# Altium PCB PCB1.PcbDoc
Units mil, origin at the board's own origin, x right, y up, seen from the top; angles counter-clockwise.
Board outline 2590 x 3365 mil, 4 copper layers (Top Layer 1, Layer 1, Layer 2, Bottom Layer 1), stack 23.712 mil thick; 19 components, 32 nets, 113 pads, 29 vias.
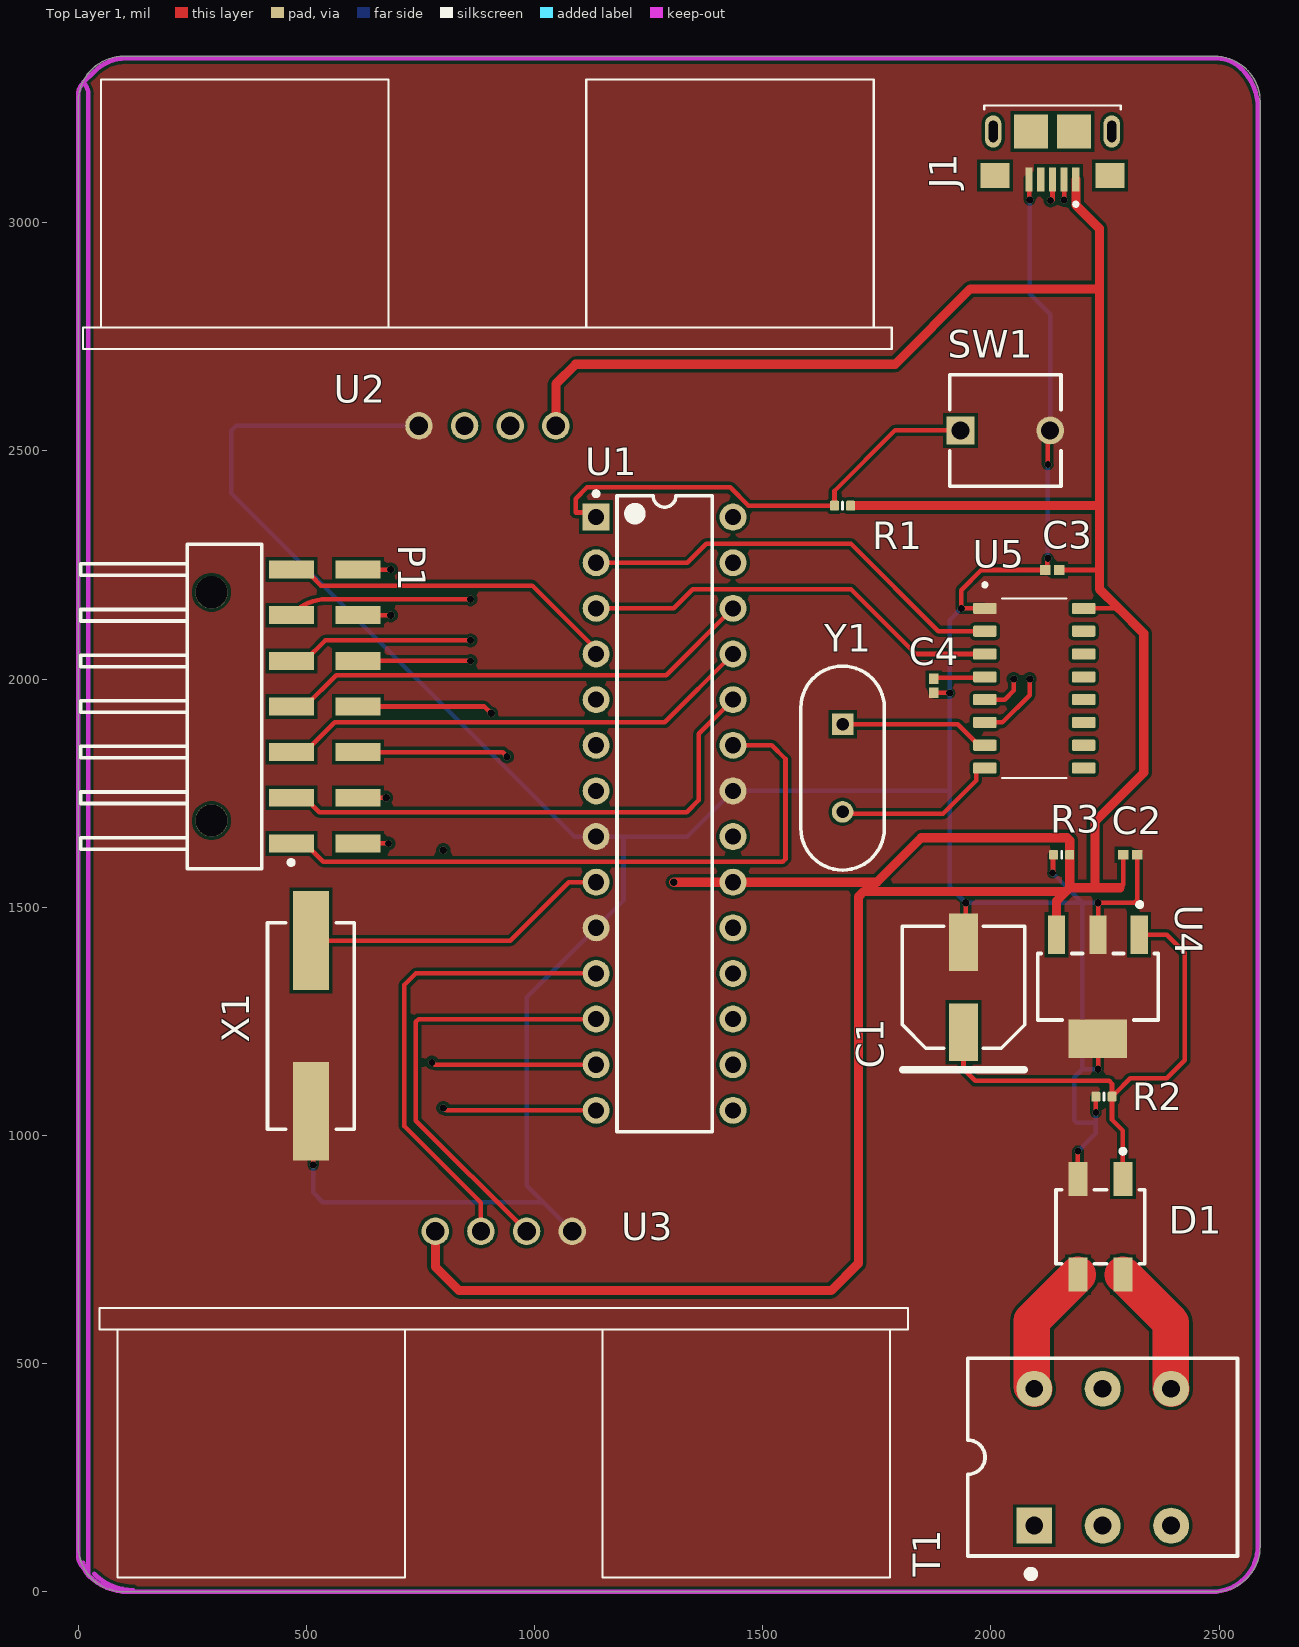
[diagram p0: Top Layer 1 view]
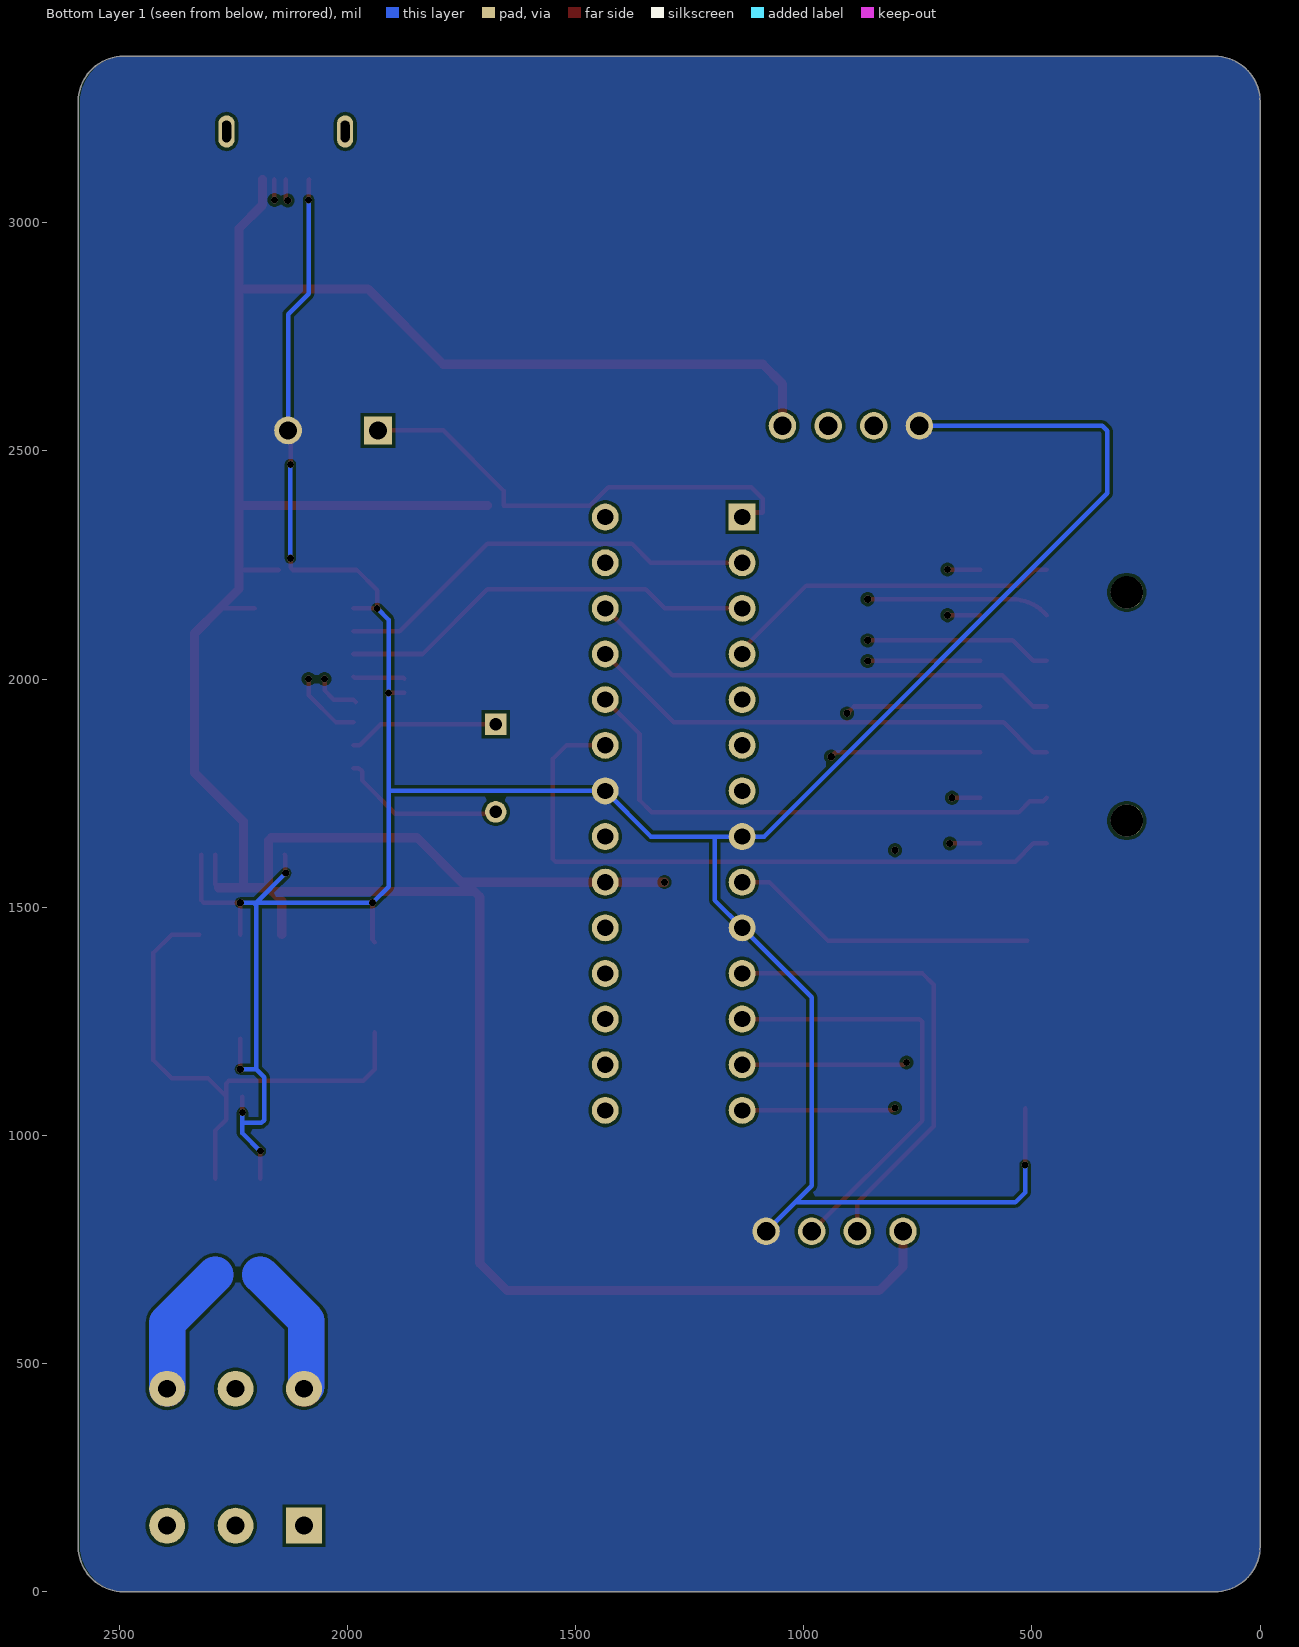
[diagram p1: Bottom Layer 1 view, seen from below]
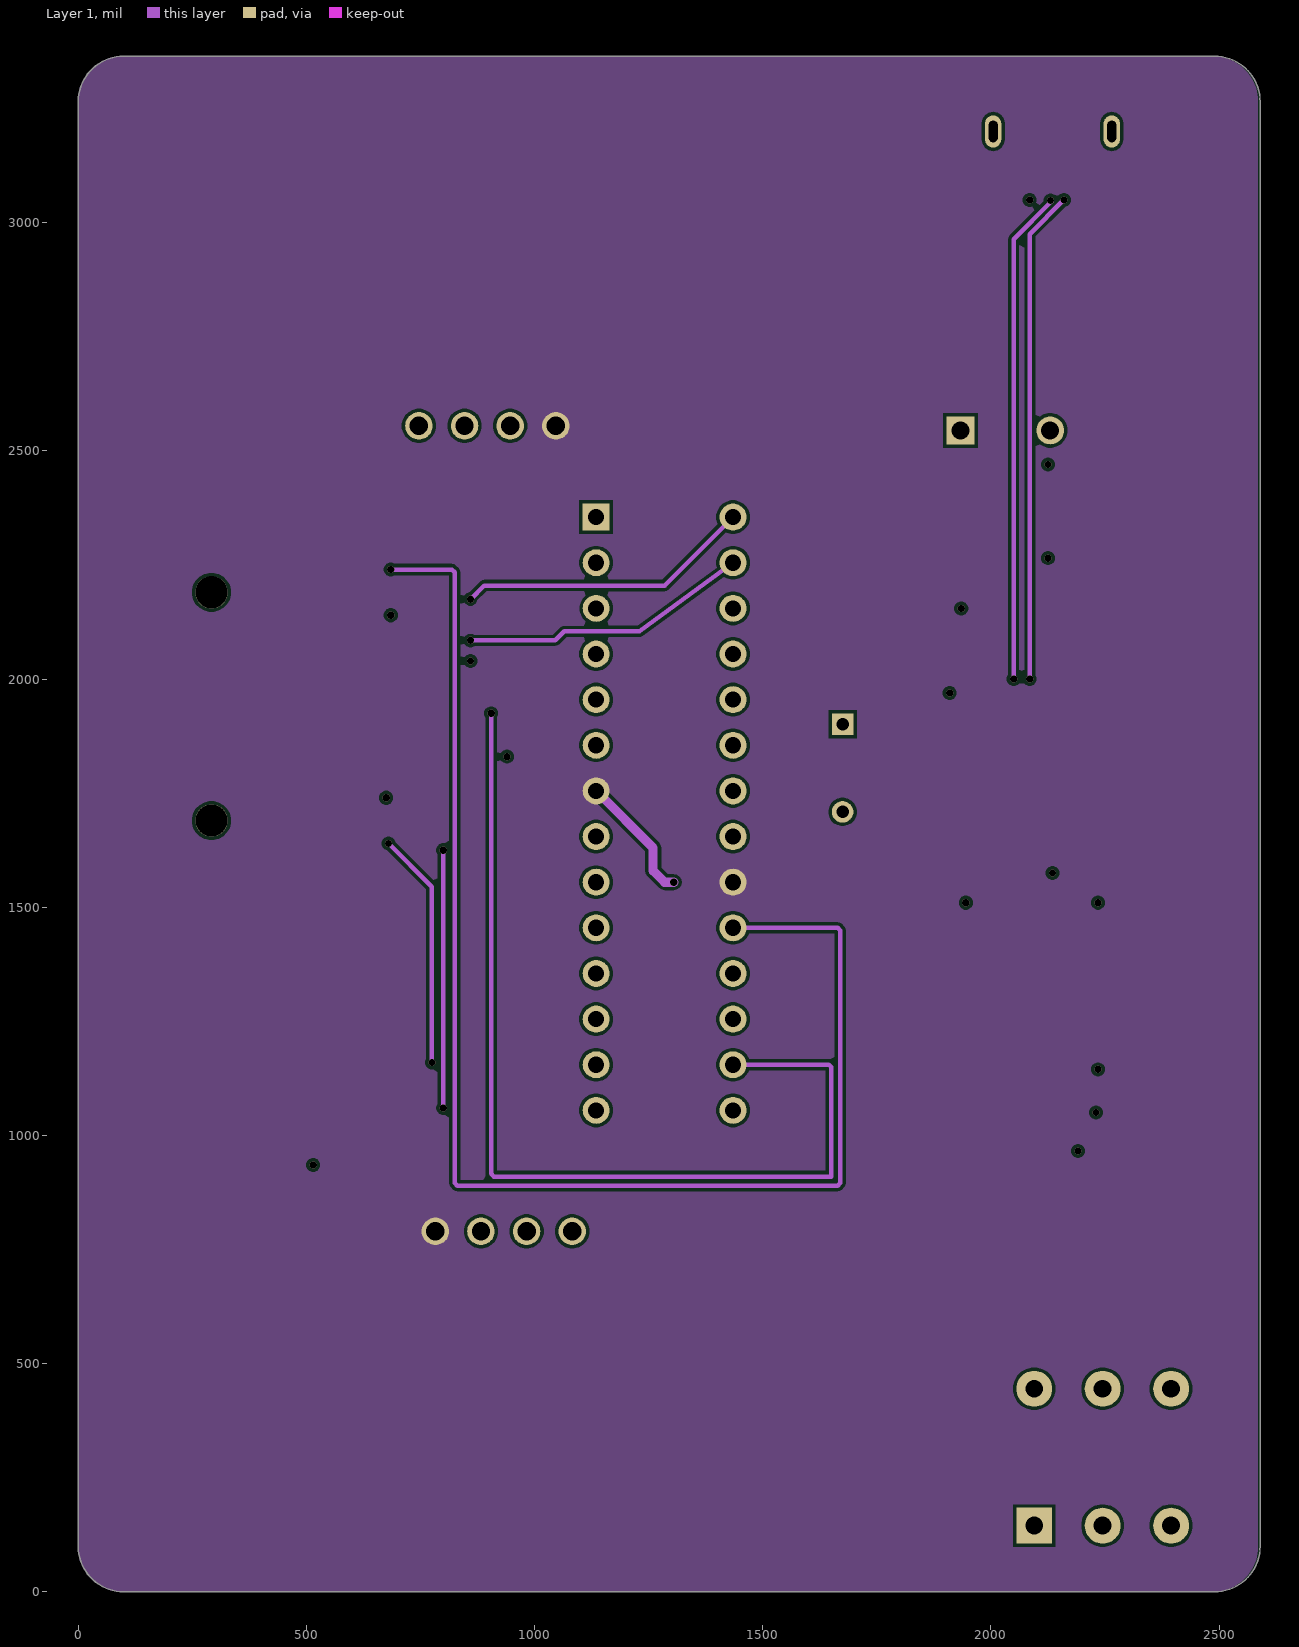
[diagram p2: Layer 1]
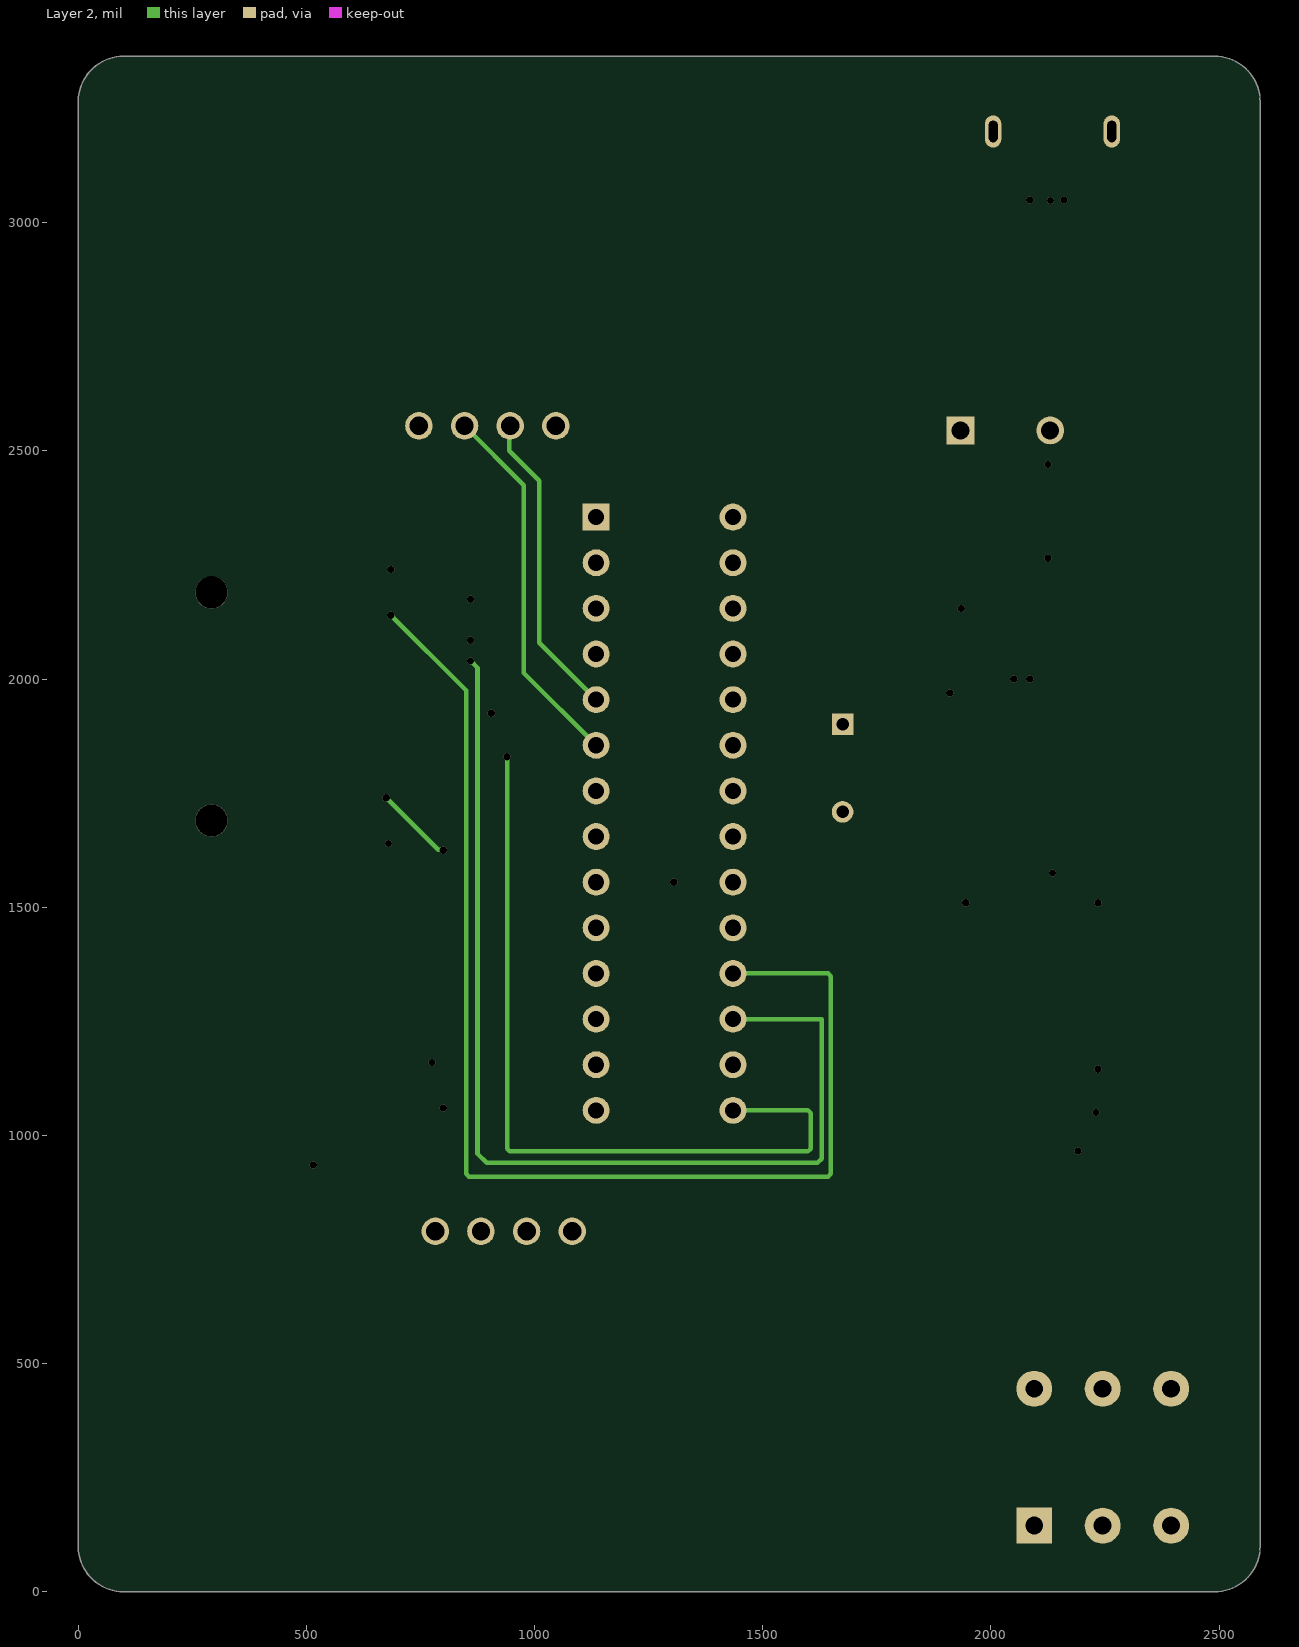
[diagram p3: Layer 2]
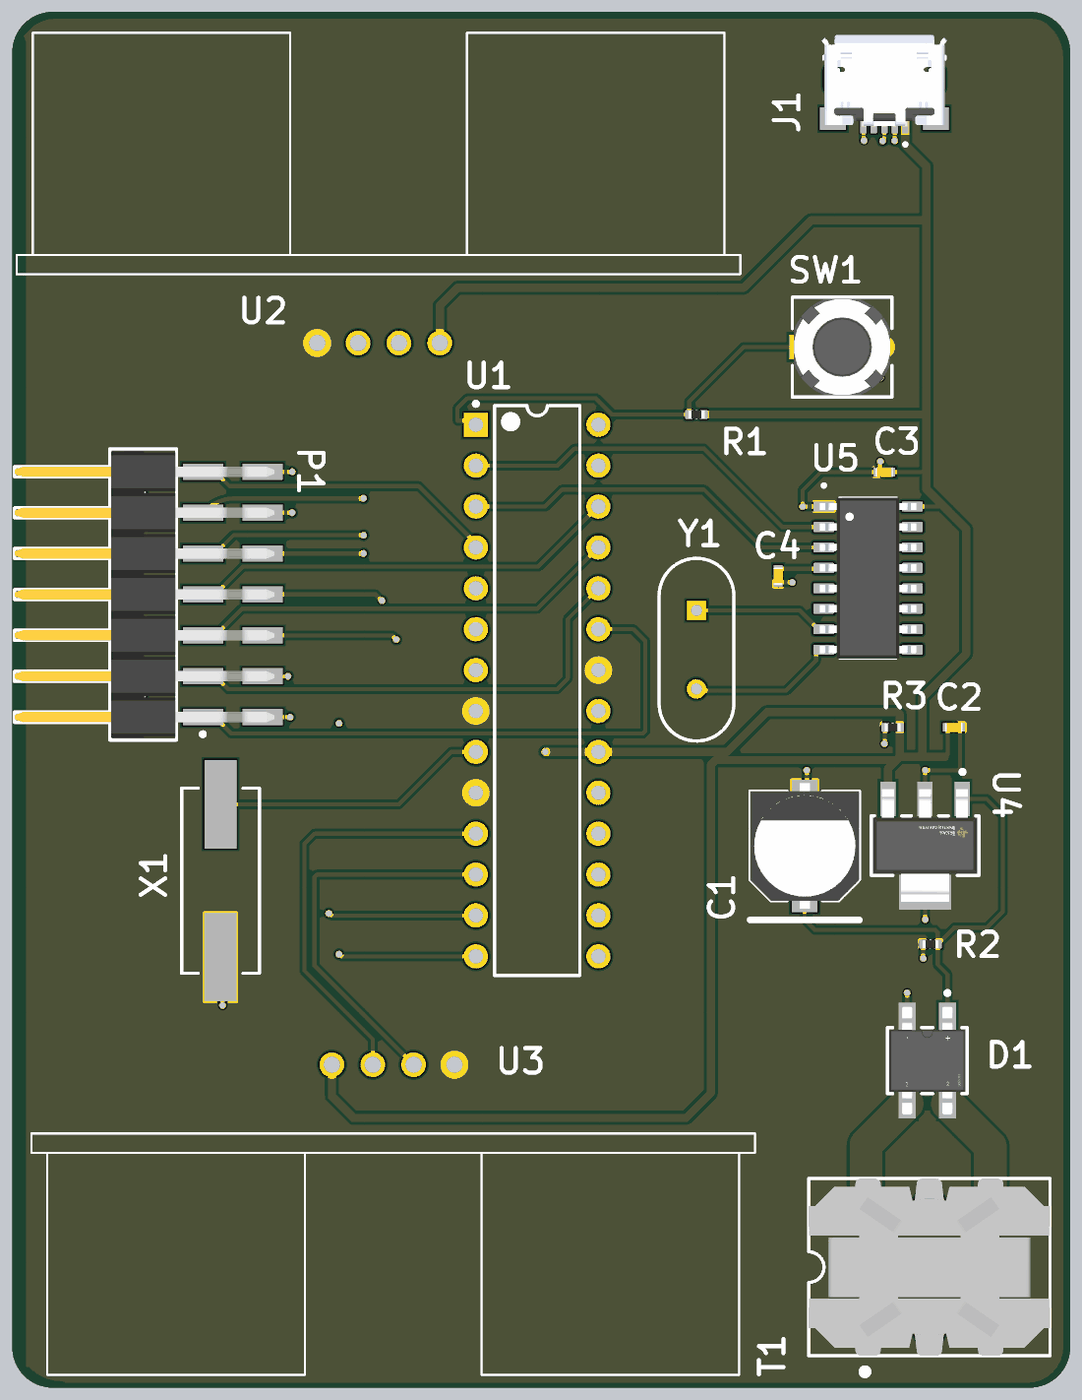
[diagram p4: 3D render of the assembled board from above, using the file's embedded part models]

## Layer stack, top to bottom
Top Solder: solder mask 0.4, Solder Resist, Dk 3.5
Top Layer 1: signal copper 1.378
Dielectric 2: prepreg 2.8, PP-006, Dk 4.1
Layer 1: signal copper 1.378
Dielectric 1: dielectric 12.6, FR-4, Dk 4.8
Layer 2: signal copper 1.378
Dielectric 3: prepreg 2.8, PP-006, Dk 4.1
Bottom Layer 1: signal copper 1.378
Bottom Solder: solder mask 0.4, Solder Resist, Dk 3.5

## Board outline
0,3265 cw(c100,3265) 100,3365 2490,3365 cw(c2490,3265) 2590,3265 2590,100 cw(c2490,100) 2490,0 100,0 cw(c100,100) 0,100 0,580

## Design rules (kind name [scope] priority, off if disabled: settings)
Clearance [All] p1: gap=7 ignorepadtopadclearanceinfootprint=TRUE
PolygonConnect PolygonConnect_8 [All vs IsNamedPolygon('5V_OUTPUT_L02_P006')] p1: connectstyle=Direct reliefconductorwidth=10 reliefentries=4 polygonreliefangle="90 Angle" airgapwidth=10
PolygonConnect PolygonConnect_7 [All vs IsNamedPolygon('5V_OUTPUT_L02_P006')] p2: connectstyle=Direct reliefconductorwidth=10 reliefentries=4 polygonreliefangle="90 Angle" airgapwidth=10
PolygonConnect PolygonConnect_6 [All vs IsNamedPolygon('GND_L04_P000')] p3: connectstyle=Direct reliefconductorwidth=10 reliefentries=4 polygonreliefangle="90 Angle" airgapwidth=10
PolygonConnect PolygonConnect_5 [All vs IsNamedPolygon('GND_L01_P001')] p4: connectstyle=Direct reliefconductorwidth=10 reliefentries=4 polygonreliefangle="90 Angle" airgapwidth=10
PolygonConnect PolygonConnect_4 [All vs IsNamedPolygon('GND_L04_P000')] p5: connectstyle=Direct reliefconductorwidth=10 reliefentries=4 polygonreliefangle="90 Angle" airgapwidth=10
PolygonConnect PolygonConnect_3 [All vs IsNamedPolygon('GND_L04_P000')] p6: connectstyle=Relief reliefconductorwidth=10 reliefentries=4 polygonreliefangle="90 Angle" airgapwidth=10
PolygonConnect PolygonConnect_2 [All vs IsNamedPolygon('GND_L01_P001')] p7: connectstyle=Relief reliefconductorwidth=10 reliefentries=4 polygonreliefangle="90 Angle" airgapwidth=10
PolygonConnect PolygonConnect_1 [All vs IsNamedPolygon('5V_OUTPUT_L01_P000')] p8: connectstyle=Relief reliefconductorwidth=10 reliefentries=4 polygonreliefangle="90 Angle" airgapwidth=10
PolygonConnect [All] p9: connectstyle=Relief reliefconductorwidth=10 reliefentries=4 polygonreliefangle="90 Angle" airgapwidth=10
RoutingVias [All] p1: holewidth=15.75 width=0.5 viastyle="Through Hole" minholewidth=11.81 minwidth=0.4 maxholewidth=31.5 maxwidth=1
ShortCircuit [All] p1 off: allowed=FALSE
SolderMaskExpansion [All] p1: expansion=4 istentingtop=FALSE
SupplyNets "Schematic Supply Nets_1" [InNet('3V3')] p1: voltage=0.000
SupplyNets "Schematic Supply Nets" [InNet('GND')] p2: voltage=0.000
UnRoutedNet [All] p1: checkbadconnections=TRUE
Width [All] p1: maxlimit=80 minlimit=10 preferedwidth=10
28 further rules are at their usual default settings.

## Classes and differential pairs
component class smarttrashcan: C1 C2 C3 C4 D1 J1 P1 R1 R2 R3 SW1 T1 U2 U3 U4 U5 X1 Y1

## Components (designator, comment, footprint, x,y, rotation, side; value= is the part's Value field where it differs from the comment)
C1 "100µF/25V" PNSC-FK-V-D8_V 1940,1325 r90 top
C2 "Capacitor 0.1 uF +/- 5% 16 V 0402" CAPC1005X56X25LL10T15 2305,1615 r180 top value=0.1µF
C3 "Capacitor 0.1 uF +/- 5% 16 V 0402" CAPC1005X56X25LL10T15 2134.79,2239.08 r0 top value=0.1µF
C4 "Capacitor 0.1 uF +/- 5% 16 V 0402" CAPC1005X56X25LL10T15 1875,1985 r90 top value=0.1µF
D1 "" FP-MBF-MFG 2240,800 r270 top value=8pF
J1 "10118193-0001LF" AMPHENOL_10118193-0001LF 2134.92,3200 r180 top
P1 "HEADERS" 610114249121 320.87,1940 r270 top
R1 "10KR2F" RESC0402(1005)_L 1675,2380 r180 top value=10k
R2 "Resistor 330R +/-5 % 0402 63 mW" RESC0402(1005)_L 2247.72,1085 r0 top value=330
R3 "Resistor 330R +/-5 % 0402 63 mW" RESC0402(1005)_L 2155,1615 r0 top value=330
SW1 "EVQ11Y04K" FP-EVQ11Y04K-MFG 2031.57,2545 r0 top
T1 "Transformer" EE13_7_4-Vertical_(EF12.6) 2245,295 r90 top
U1 "ATmega328P-PU" 28P3 1285,1705 r0 top
U2 "HC-SR04" XCVR_HC-SR04 896.65,2555 r180 top
U3 "HC-SR04" XCVR_HC-SR04 932.6,790 r0 top
U4 "LM7805" FP-DCY0004A-MFG 2234.45,1325.83 r270 top
U5 "CH340G" SOIC127P600X180-16N 2095,1980 r0 top
X1 "16MHz" FOX-FOXSDLF160-20_V 510,1240 r90 top
Y1 "12MHz" FOX-FOXSLF-2_V 1675,1805 r270 top

## Footprints (in the part's own frame and the unit in brackets; to place one, negate y for a bottom-side part, rotate by r counter-clockwise, add the part's x,y. Pads: shape width x height; smd on the part's side, far side on the other; paste and mask are expansions set on the pad)
28P3 [mm] "28-Pin Plastic Dual In-Line Package (PDIP)"
  rect 1.5x1.5 hole 0.9: 1(-3.81,16.51)
  round 1.5 hole 0.9: 2(-3.81,13.97) 3(-3.81,11.43) 4(-3.81,8.89) 5(-3.81,6.35) 6(-3.81,3.81) 7(-3.81,1.27) 8(-3.81,-1.27) 9(-3.81,-3.81) 10(-3.81,-6.35) 11(-3.81,-8.89) 12(-3.81,-11.43) 13(-3.81,-13.97) 14(-3.81,-16.51) 15(3.81,-16.51) 16(3.81,-13.97) 17(3.81,-11.43) 18(3.81,-8.89) 19(3.81,-6.35) 20(3.81,-3.81) 21(3.81,-1.27) 22(3.81,1.27) 23(3.81,3.81) 24(3.81,6.35) 25(3.81,8.89) 26(3.81,11.43) 27(3.81,13.97) 28(3.81,16.51)
  silkscreen extent -3.93,-17.7 2.65,17.93, body extent -3.6,-17.65 3.6,17.65, height 4.58
610114249121 [mm] "Pin Header, pitch 2.54 mm, SMD, Angled, dual row, 14p"
  rect 1x2.5 smd: 1(7.62,3.72) 2(7.62,7.42) 3(5.08,3.72) 4(5.08,7.42) 5(2.54,3.72) 6(2.54,7.42) 7(0,3.72) 8(0,7.42) 9(-2.54,3.72) 10(-2.54,7.42) 11(-5.08,3.72) 12(-5.08,7.42) 13(-7.62,3.72) 14(-7.62,7.42)
  round 1.8 hole 1.8 unplated: MH1(6.35,-0.73) MH2(-6.35,-0.73)
  silkscreen extent -9.04,-8 9.04,3.83, body extent -8.89,-8 8.89,8.16, height 5.1
AMPHENOL_10118193-0001LF [mm]
  rect 0.4x1.35 smd: 1(-1.3,2.675) 2(-0.65,2.675) 3(0,2.675) 4(0.65,2.675) 5(1.3,2.675)
  rect 1.6x1.4 smd: S1(-3.2,2.45) S2(3.2,2.45)
  rect 1.9x1.9 smd: S3(1.2,0) S4(-1.2,0)
  oval 0.9x1.8 hole 0.5 slot 1.2 at 90 deg: S5(-3.3,0) S6(3.3,0)
  silkscreen extent -3.8,-1.45 3.8,4.15, body extent -3.93,-2.76 3.93,2.95, height 2.85
CAPC1005X56X25LL10T15 [mm] "Chip Capacitor, 2-Leads, Body 1.10x0.60mm, IPC High Density"
  rect 0.58x0.54 smd: 1(-0.39,0) 2(0.39,0)
  body extent -0.55,-0.3 0.55,0.3, height 0.56
EE13_7_4-Vertical_(EF12.6) [mm] "THT, 6-Leads, Body 15 x11mm (max), Pitch 3.81mm"
  rect 2x2 hole 1: 1(-3.81,3.81)
  round 2 hole 1: 2(-3.81,0) 3(-3.81,-3.81) 4(3.81,-3.81) 5(3.81,0) 6(3.81,3.81)
  silkscreen extent -6.7,-7.5 5.5,7.5, body extent -5.5,-7.5 5.5,7.5, height 16.8
FOX-FOXSDLF160-20_V [mm] "SMD, 2-Leads, Body 5x11.7mm, Height 4.5mm"
  rect 5.5x2 smd: 1(-4.75,0) 2(4.75,0)
  silkscreen extent -5.75,-2.41 5.75,2.41, body extent -6.6,-2.41 6.6,2.41, height 4.5
FOX-FOXSLF-2_V [mm] "THD, 2-Leads, Body 11.35x4.65mm, Pitch 4.88mm"
  rect 1.2x1.2 hole 0.7: 1(-2.44,0)
  round 1.2 hole 0.7: 2(2.44,0)
  silkscreen extent -5.68,-2.32 5.68,2.32, body extent -5.68,-2.33 5.68,2.33, height 3.6
FP-DCY0004A-MFG [mm]
  rect 2.15x0.95 smd paste+0 mask+0: 1(-2.9,2.3) 2(-2.9,0) 3(-2.9,-2.3)
  rect 2.15x3.25 smd paste+0 mask+0: 4(2.9,0)
  silkscreen extent -4.7,-3.35 1.85,3.35, body extent -4.08,-3.45 4.08,3.45, height 0.25
FP-EVQ11Y04K-MFG [mm]
  rect 1.55x1.55 hole 1 paste-2539.97 mask+0: A(-2.5,0)
  round 1.55 hole 1 paste-2539.97 mask+0: B(2.5,0)
  silkscreen extent -3.1,-3.1 3.1,3.1, body extent -3.37,-3.2 3.37,3.2, height 0.25
FP-MBF-MFG [mm]
  rect 1.875x1.05 smd paste+0 mask+0: 1(-2.662,1.25) 2(2.662,1.25) 3(-2.662,-1.25) 4(2.662,-1.25)
  silkscreen extent -4.32,-2.47 2.05,2.47, body extent -3.7,-2.58 3.7,2.58, height 0.25
PNSC-FK-V-D8_V [mm] "CAPAE, 2-Leads, Body 6.80x6.80mm"
  rect 3.2x1.6 smd: 1(-2.5,0) 2(2.5,0)
  silkscreen extent -4.6,-3.4 3.4,3.4, body extent -3.9,-3.4 3.9,3.4, height 8
RESC0402(1005)_L [mm] "Chip Resistor, Body 1.0x0.5mm, IPC High Density"
  rrect25% 0.5x0.55 smd: 1(-0.45,0) 2(0.45,0)
  silkscreen extent 0,-0.2 0,0.2, body extent -0.5,-0.25 0.5,0.25, height 0.3
SOIC127P600X180-16N [mm]
  rrect25% 1.31x0.62 smd: 1(-2.75,4.445) 2(-2.75,3.175) 3(-2.75,1.905) 4(-2.75,0.635) 5(-2.75,-0.635) 6(-2.75,-1.905) 7(-2.75,-3.175) 8(-2.75,-4.445) 9(2.75,-4.445) 10(2.75,-3.175) 11(2.75,-1.905) 12(2.75,-0.635) 13(2.75,0.635) 14(2.75,1.905) 15(2.75,3.175) 16(2.75,4.445)
  silkscreen extent -2.85,-5 1.78,5.85, body extent -3,-5 3,5, height 1.8
XCVR_HC-SR04 [mm]
  round 1.53 hole 1.02: 1(-3.81,0) 2(-1.27,0) 3(1.27,0) 4(3.81,0)
  silkscreen extent -22.5,-19.27 22.5,-4.27

## Part data
C1: library part CMP-2000-06206-1, "Aluminum Electrolytic Capacitor, 100 uF, +/- 20%, 25 V, 2-Pin SMD (Size Code D8), -55 to 105 degC, RoHS, Tape and Reel", Capacitance=100µF, Case Size/Dimension=Ø6.3x7.7mm, Lifetime@Temperature=2000Hrs@105°C, Manufacturer=Panasonic, Operating Temp Range=-55to+105°C, Operating Temp-Max=105°C, Package Description="2-Pin Electrolytic Aluminum Capacitor, Body 6.6 x 6.6 mm", Package Reference=FK-V-D8, Rated Voltage=25V, Ripple Current=280mA, Datasheet URL=http://industrial.panasonic.com/cdbs/www-data/pdf/RDE0000/ABA0000C1181.pdf, Datasheet Version=03/2016, Impedance=0.34O, Manufacturer URL=http://www.panasonic.com/, Mounting Technology=SurfaceMount, Package URL=http://industrial.panasonic.com/cdbs/www-data/pdf/RDE0000/DME0000COL48.pdf, Series=FK, Type=Can
C2 C3 C4: library part CMP-001-00001-6, "Chip Capacitor, 0.1 uF, +/- 5%, 16 V, 0402 (1005 Metric)", Capacitor Type=Ceramic, Case/Package=0402, Max Operating Temperature=125°C, Min Operating Temperature=-55°C, Tolerance=5%, Voltage Rating=16V, Mounting Technology=SM, Pins=2, RoHS Compliant=True
D1: library part CMP-12791-000022-1, "BRIDGE RECT 1PHASE 1KV 800MA MBF", Capacitance=8pF, Forward Current=0.5A, Manufacturer="Diodes Incorporated", Manufacturer Part Number=MB10F-13, Max Junction Temp=+150°C, Max Repetitive Reverse Voltage=1000V, Max Surge Forward Current=30A, Package=MBF, Peak Reverse Current=0.2uA, Temperature="-55°C to +150°C", Temperature Range Low=-55°C, Automotive=No, Category=Diode, ComponentLink2Description=Datasheet, ComponentLink2URL=https://www.diodes.com/assets/Datasheets/MB10F.pdf, Device Class L1="Discrete Semiconductors", Device Class L2=Diodes, Device Class L3="Rectifier Diodes", Digikey Description="BRIDGE RECT 1PHASE 1KV 800MA MBF", Footprint Url=https://www.diodes.com/assets/Package-Files/MBF.pdf, Height=1.8mm, Lead Free=Yes, Mouser Description="Diode Rectifier Bridge Single 1000V 0.8A 4-Pin Case MBF T/R", Octopart=https://octopart.com/mb10f-13-diodes+inc.-82160020, Reverse Voltage=1000V, RoHS=TRUE, Temperature Range High=+150°C
J1: library part CMP-002-00074-1, "Right Angle Surface Mount Mount Female USB Connector 100 V ac 1.8A", Case/Package=None, Check_prices=https://www.snapeda.com/parts/10118193-0001LF/Amphenol+FCI/view-part/?ref=eda, Component Type=Standard, Design Item ID=10118193-0001LF, MF="Amphenol ICC", MP=10118193-0001LF, Pins=11, SnapEDA_Link=https://www.snapeda.com/parts/10118193-0001LF/Amphenol+FCI/view-part/?ref=snap, Source=10118193-0001LF.SchLib
P1: library part CMP-1502-01150-3, Color=Black, Contact Resistance=20mΩ, Current Rating=3A, Operating Supply Voltage=250V, Connector Type="Male Pin", Contact Mating Length=5.9944mm, Contact Plating=Gold, Gender=Male, Lead Pitch=2.54mm, Mount="Surface Mount", NexarPartId=52645097, Number of Contacts=14, Number of Pins=14, Number of Positions=14, Number of Rows=2, Packaging="Tape and Reel", Pitch=2.54mm, REACH SVHC=Unknown, RoHS=Compliant, Row Spacing=2.54mm, Termination=Solder
R1: library part CMP-009-00066-2, "10K 0.063W 1% 0402 (1005 Metric)  SMD", Case/Package=0402, Power=63mW, Tolerance=1%, Mounting Technology=SMT, Pins=2
R2 R3: library part CMP-009-00132-3, "Chip Resistor, 330 Ohms, +/-5 %, 63 mW, -55 to 155 degC, 0402", Case/Package=0402, Max Operating Temperature=155°C, Min Operating Temperature=-55°C, Power=63mW, Tolerance=5%, Pins=2
SW1: library part CMP-05618-000106-1, "SWITCH TACTILE SPST-NO 0.02A 15V", Actuator Color=Black, Case/Package=Radial, Contact Resistance=50mR, Max Operating Temperature=70°C, Max Voltage Rating (DC)=15V, Min Operating Temperature=-20°C, Operating Force=1.6N, Package Quantity=1, Actuator Length=0.4mm, Actuator Type=Standard, Electrical Life=1000000Cycles, Illumination Type=Non-Illuminated, Lead Free="Lead Free", Mechanical Life=1000000Cycles, Mount="Through Hole", Orientation=Straight, Packaging="Tape and Reel", Radiation Hardening=No, RoHS Compliant=Yes, Series=EVQ11, Size=6mm, Switch Function=Off-Mom, Switch Travel=0.25mm, Termination="PC Pin", Throw Configuration=SPST
T1: library part CMP-1476-00004-1, "Off-Line Transformer WE-UNIT , L=2.8mH", Inductance=2.8mH, Input Voltage (AC)=85-265, Manufacturer="Wuerth Elektronik", Output Current (A)=0.25, Output Voltage (DC)=12, PartNumber=7491181012, ComponentLink1Description="Manufacturer URL", ComponentLink1URL=http://www.we-online.com, ComponentLink2Description=Datasheet, ComponentLink2URL=http://www.we-online.de/katalog/media/pdf/7491181012.pdf, PackageReference=EE13_7_4-Vertical_(EF12.6), Turns Ratio="\"8.1\",\"1\""
U1: library part CMP-0095-00013-2, "8-bit AVR Microcontroller, 32KB Flash, 1KB EEPROM, 2KB SRAM, 28-pin PDIP, Industrial Grade (-40°C to 85°C)", ComponentLink1Description="Manufacturer URL", ComponentLink1URL=http://www.atmel.com/, ComponentLink2Description="ATmega48A/48PA/88A/88PA/168A/168PA/328/328P Datasheet", ComponentLink2URL=http://www.atmel.com/dyn/resources/prod_documents/8271.pdf, ComponentLink3Description="ATmega48A/48PA/88A/88PA/168A/168PA/328/328P Summary", ComponentLink3URL=http://www.atmel.com/dyn/resources/prod_documents/8271S.pdf, DatasheetVersion="revD, May-2011", PackageDescription="28-lead (0.300\"/7.62mm Wide) Plastic Dual Inline Package (PDIP)", PackageReference=28P3, PackageVersion="revB, Sep-2001", RevisionNote="DatasheetVersion updated. URLs added."
U2 U3: library part CMP-041-000000-1, "Ultrasonic Sensor Module", Package=None, Availability=Unavailable, Component Type=Standard, Design Item ID=HC-SR04, MP=HC-SR04, Pin Count=4, Price=None, Source=HC-SR04.SchLib
U4: library part CMP-04917-000007-1, "IC REG LINEAR 5V 1.5A SOT223-4", Dropout Voltage=2V, Manufacturer="Texas Instruments", Manufacturer Part Number=LM7805MP/NOPB, Max Junction Temp=+150°C, Max Supply Voltage=30V, Min Supply Voltage=7.5V, Nominal Supply Current=8mA, Output Current=1.5A, Output Voltage=5V, Package=DCY0004A, Temperature="0°C to +125°C", Temperature Range High=+125°C, Temperature Range Low=0°C, Accuracy Percentage=3%, Automotive=No, Category=IC, ComponentLink2Description=Datasheet, ComponentLink2URL=http://www.ti.com/lit/ds/symlink/lm7800.pdf, Device Class L1="Integrated Circuits (ICs)", Device Class L2="Power Management ICs", Device Class L3="Voltage Regulators - Linear", Digikey Description="IC REG LINEAR 5V 1.5A SOT223-4", Height=1.8mm, Lead Free=Yes, Number Of Outputs=1, Octopart=https://octopart.com/lm7805mp%2Fnopb-texas+instruments-74629991, Output Type=Fixed, RoHS=TRUE, Standoff Height=0.02mm
U5: library part CMP-031-000000-1, "USB Interface Integrated Circuit", Package=None, Availability="Not in stock", Check_prices=https://www.snapeda.com/parts/Ch340G/WCH/view-part/?ref=eda, Component Type=Standard, Design Item ID=CH340G, MF=WCH, MP=Ch340G, Pin Count=16, Price=None, SnapEDA_Link=https://www.snapeda.com/parts/Ch340G/WCH/view-part/?ref=snap, Source=CH340G.SchLib
X1: library part CMP-003-00024-2, "Resistance Weld SMD Crystal, 16 MHz, +/- 30 ppm, 20 pF, -20 to 70 degC, 2-Pin SMD, RoHS, Tape and Reel", Case/Package=FOX-FOXSDLF160-20, Frequency Tolerance=30ppm, Load Capacitance=20pF, Manufacturer="FOX Electronics", Max Operating Temperature=70°C, Min Operating Temperature=-20°C, Package Description="2-Pin Surface Mount Device, Body 5 x 11.7 mm, Height 4.5 mm", Package Quantity=1, Resistance=40Ohm, Tolerance=50ppm, Datasheet URL=http://foxonline.com/pdfs/hc49sdlf.pdf, Datasheet Version=Mar-15, ESR=40, Frequency=16MHz, Manufacturer URL=http://www.foxonline.com/, Mounting Technology=SM, Package Reference=FOX-FOXSDLF160-20, Packaging=TapeandReel, Pins=2, RoHS Compliant=True
Y1: library part CMP-003-00026-2, "Resistance Weld Thru-Hole Crystal, 12 MHz, +/-30 ppm, 20 pF, -20 to 70 degC, 2-Pin THD, RoHS, Bulk", Case/Package=FOXSLF-2, Frequency Tolerance=30ppm, Load Capacitance=20pF, Manufacturer="FOX Electronics", Max Operating Temperature=70°C, Min Operating Temperature=-20°C, Package Description="2-Pin Through Hole Device, Body 11.35 x 4.65 mm, Pitch 4.88 mm", Package Quantity=100, Resistance=60Ohm, Tolerance=50ppm, Datasheet URL=http://www.foxonline.com/pdfs/hc49slf.pdf, Datasheet Version=Mar-15, ESR=60, Frequency=12MHz, Manufacturer URL=http://www.foxonline.com/, Mounting Technology=TH, Package Reference=FOXSLF-2, Packaging=Bulk, Pins=2, RoHS Compliant=True

## Via types
v1: diameter 15.75, hole 15.75, Top Layer 1 to Bottom Layer 1, 29 vias

## Nets (pads, with @x,y where several pads share a name; then routed paths per layer and width w, separated by ;. In a path a pad name is that pad's centre, name@x,y a point inside that pad or via, vN(x,y) a via of type N, cw(c..) or ccw(c..) an arc to the next point about the centre after c; other vN are vias at no path point)
3V3: C4.2 U5.4 | length 113.7
  Top Layer 1 w10: C4.2 1877.32,2002.68 1984.41,2002.68 U5.4
"5V OUTPUT": C2.2 C3.2 J1.1 R1.1 R3.2 U1.7 U1.20 U2.1 U3.1 U4.3 U5.16 | length 7648
  Top Layer 1 w10: C3.2 2237.04,2239.08 2237.96,2240 ; U5.16 2280,2155 ; 2282.72,1542.72 2289.65,1549.65 C2.2
  Top Layer 1 w20: U3.1 782.6,712.4 835,660 1650,660 1710,720 1710,1523.16 1721.72,1534.87 2164.87,1534.87 ; U2.1 1046.65,2646.65 1090,2690 1790,2690 1955,2855 2237.96,2855 ; v1(1305,1555) U1.20 1750,1555 1847.28,1652.28 2166.86,1652.28 2172.72,1646.43 R3.2 2172.72,1542.72 ; R1.1 2237.96,2380 ; U4.3 2143.9,1513.9 2164.87,1534.87 ; J1.1 2186.1,3038.9 2237.96,2987.04 2237.96,2855 ; 2282.72,1542.72 2227.72,1542.72 ; 2164.87,1534.87 2172.72,1542.72 ; 2172.72,1542.72 2227.72,1542.72 ; 2227.72,1542.72 2227.72,1687.72 2335,1795 2335,2100 2280,2155 2237.96,2197.04 2237.96,2240 2237.96,2380 ; 2237.96,2380 2237.96,2855
  Layer 1 w20: U1.7 1260,1630 1260,1580 1285,1555 v1(1305,1555)
D+: J1.3 U5.5 | length 1237.9
  Top Layer 1 w10: U5.5@1981.5,1949.77 U5.5 2030,1955 2050,1975 v1(2050,2000) ; v1(2130.87,3048.97) 2134.92,3048.97 J1.3
  Layer 1 w10: v1(2050,2000) 2050,2964.04 2132.9,3046.94 v1(2130.87,3048.97)
D-: J1.2 U5.6 | length 1284.1
  Top Layer 1 w10: U5.6 2025,1905 2085,1965 v1(2085,2000) ; v1(2160,3050) 2160.26,3050.26 2160.26,3094.43 J1.2
  Layer 1 w10: v1(2085,2000) 2085,2975 v1(2160,3050)
GND: C1.2 C2.1 C3.1 C4.1 D1.3 J1.5 R2.1 R3.1 SW1.B U1.8 U1.10 U1.22 U2.4 U3.4 U4.2 U4.4 U5.1 X1.1 | length 7639.1
  Top Layer 1 w10: v1(515,935) X1.1@515,1060 ; C4.1 v1(1909.65,1969.65) ; C1.2 1945,1428.43 v1(1945,1510) ; U5.1 v1(1935,2155) 1935,2195 1979.08,2239.08 C3.1 2123.9,2243.54 2123.9,2263.9 v1(2125,2265) ; J1.5 2084.37,3094.06 2084.37,3050.63 v1(2085,3050) ; SW1.B@2123.43,2530 2124.21,2529.21 2124.21,2470.79 v1(2125,2470) ; v1(2135,1575) 2136.1,1576.1 2136.1,1613.82 R3.1 ; D1.3 v1(2190.79,965.79) ; v1(2230,1050) R2.1 ; U4.4 2235,1211.1 v1(2235,1145) ; U4.2 2235,1440.55 v1(2235,1510) 2314.5,1510 2320.35,1515.86 C2.1
  Bottom Layer 1 w10: v1(515,935) 515,875 536.2,853.8 1018.8,853.8 ; U2.4 345.86,2555 335,2544.14 335,2406.89 1086.89,1655 U1.8 1195,1655 ; U3.4 1018.8,853.8 ; v1(1935,2155) 1909.65,2129.65 v1(1909.65,1969.65) 1909.65,1757.5 ; v1(2085,3050) 2085,2844.4 2130,2799.4 SW1.B ; v1(2125,2265) v1(2125,2470) ; v1(2135,1575) 2200,1510 ; v1(2190.79,965.79) 2230,1005 2230,1027.5 ; v1(2230,1050) 2230,1027.5 ; v1(2235,1145) 2200,1145 ; v1(2235,1510) 2205.86,1510 ; 1018.8,853.8 982.6,890 982.6,1302.6 U1.10 1195,1515 1195,1655 ; 1195,1655 1335,1655 U1.22 1907.15,1755 1909.65,1757.5 ; 1909.65,1757.5 1909.65,1545.35 v1(1945,1510) 2200,1510 ; 2200,1145 2200,1504.14 2205.86,1510 ; 2200,1145 2182.5,1127.5 2182.5,1033.36 2188.36,1027.5 2230,1027.5 ; 2200,1510 2205.86,1510
NetC1_1: C1.1 D1.1 R2.2 U4.1 | length 1182.6
  Top Layer 1 w10: C1.1 1940,1145 1965.43,1119.57 2259.58,1119.57 2265.43,1113.71 R2.2 2265.43,1034.57 2289.21,1010.79 D1.1 ; R2.2@2265.43,1085.98 2270.28,1090.83 2271.26,1090.83 2305.43,1125 2385,1125 2425,1165 2425,1400 2385,1440 U4.1
NetD1_2: D1.2 T1.4 | length 587.1
  Top Layer 1 w80: D1.2 2394.39,590 2394.39,445.61 T1.4
  Bottom Layer 1 w80: 2289.21,695.18 2394.39,590 T1.4@2394.39,445.61
NetD1_4: D1.4 T1.6 | length 580.9
  Top Layer 1 w80: T1.6 2090,450 2090,594.39 D1.4
  Bottom Layer 1 w80: T1.6@2090,450 2090,594.39 2190.79,695.18
NetR1_2: R1.2 SW1.A U1.1 | length 1036.5
  Top Layer 1 w10: U1.1 1125,2365 1090,2365 1090,2395 1115,2420 1428.73,2420 1468.73,2380 R1.2 1657.28,2412.28 1790,2545 SW1.A
NetU1_9: U1.9 X1.2 | length 678
  Top Layer 1 w10: X1.2 947.01,1427.01 1075,1555 U1.9
NetU5_7: U5.7 Y1.1 | length 330.8
  Top Layer 1 w10: Y1.1 1927.09,1901.06 1973.15,1855 U5.7
NetU5_8: U5.8 Y1.2 | length 366.5
  Top Layer 1 w10: Y1.2 1678.94,1705 1895,1705 1967.8,1777.8 1967.8,1797.8 1975,1805 U5.8
PB0: P1.4 U1.14 | length 1136.7
  Top Layer 1 w10: P1.4 v1(675,1740) ; v1(800,1060) 801.56,1060 806.56,1055 U1.14
  Layer 1 w10: v1(800,1060) v1(800,1625)
  Layer 2 w10: v1(675,1740) 788.9,1626.1 798.9,1626.1 v1(800,1625)
PB1: P1.6 U1.15 | length 2110.9
  Top Layer 1 w10: P1.6 930,1840 v1(940,1830)
  Layer 2 w10: v1(940,1830) 940,970.86 945.86,965 1599.14,965 1605,970.86 1605,1049.14 1599.14,1055 U1.15
PB2: P1.8 U1.16 | length 2511.9
  Top Layer 1 w10: P1.8 890,1940 v1(905,1925)
  Layer 1 w10: v1(905,1925) 905,915.86 910.86,910 1650,910 1650,1150 1645,1155 U1.16
PB3: P1.10 U1.17 | length 2599.4
  Top Layer 1 w10: P1.10 v1(860,2040)
  Layer 2 w10: v1(860,2040) 875,2025 875,960 895,940 1620,940 1629.14,949.14 1629.14,1255 U1.17
PB4: P1.12 U1.18 | length 2818.3
  Top Layer 1 w10: P1.12 v1(685,2140)
  Layer 2 w10: v1(685,2140) 850,1975 850,915.86 855.86,910 1643.28,910 1649.14,915.86 1649.14,1349.14 1643.28,1355 U1.18
PB5: P1.14 U1.19 | length 3193.3
  Top Layer 1 w10: P1.14 v1(685,2240)
  Layer 1 w10: v1(685,2240) 819.14,2240 825,2234.14 825,895.86 830.86,890 1664.14,890 1670,895.86 1670,1449.14 1664.14,1455 U1.19
PC0: P1.1 U1.23 | length 1448.2
  Top Layer 1 w10: P1.1 496.85,1640 536.85,1600 1544.14,1600 1550,1605.86 1550,1825 1520,1855 U1.23
PC1: P1.3 U1.24 | length 1167.9
  Top Layer 1 w10: P1.3 475,1732.32 504.53,1732.32 528.54,1708.31 1333.31,1708.31 1360,1735 1360,1880 U1.24
PC2: P1.5 U1.25 | length 1056.7
  Top Layer 1 w10: P1.5 496.85,1840 561.98,1905.13 1285.13,1905.13 U1.25
PC3: P1.7 U1.26 | length 1056.7
  Top Layer 1 w10: P1.7 496.85,1940 565.17,2008.31 1288.31,2008.31 U1.26
PC4: P1.9 U1.27 | length 1043.6
  Top Layer 1 w10: P1.9 496.85,2040 541.85,2085 v1(860,2085)
  Layer 1 w10: v1(860,2085) 1045,2085 1065,2105 1230,2105 U1.27
PC5: P1.11 U1.28 | length 1052.4
  Top Layer 1 w10: P1.11 473.03,2145.71 cw(c543.74,2075) 543.74,2175 v1(860,2175)
  Layer 1 w10: v1(860,2175) 890,2205 1285,2205 U1.28
PD2: P1.13 U1.4 | length 750.2
  Top Layer 1 w10: P1.13 495.31,2240 510,2225.31 511.54,2225.31 531.85,2205 995,2205 1135,2065 U1.4
PD3: U1.5 U2.2 | length 679.4
  Layer 2 w10: U2.2 945,2553.35 945,2500 1010,2435 1010,2080 U1.5
PD4: U1.6 U2.3 | length 819.4
  Layer 2 w10: U2.3 976.65,2425 976.65,2013.35 U1.6
PD5: U1.11 U3.2 | length 1039.8
  Top Layer 1 w10: U3.2 882.6,852.4 715,1020 715,1330 740,1355 U1.11
PD6: U1.12 U3.3 | length 957.1
  Top Layer 1 w10: U3.3 740,1032.6 740,1249.14 745.86,1255 U1.12
PD7: P1.2 U1.13 | length 948.4
  Top Layer 1 w10: P1.2 v1(680,1640) ; v1(775,1160) 776.56,1160 781.56,1155 U1.13
  Layer 1 w10: v1(680,1640) 775,1545 v1(775,1160)
RX: U1.3 U5.3 | length 927.6
  Top Layer 1 w10: U1.3 1305,2155 1346.53,2196.53 1693.47,2196.53 1835,2055 U5.3
TX: U1.2 U5.2 | length 948.3
  Top Layer 1 w10: U1.2 1335,2255 1376.53,2296.53 1693.47,2296.53 1885,2105 U5.2
pads on no net: J1.4 J1.S1 J1.S2 J1.S3 J1.S4 J1.S5 J1.S6 P1.MH1 P1.MH2 T1.1 T1.2 T1.3 T1.5 U1.21 U5.9 U5.10 U5.11 U5.12 U5.13 U5.14 U5.15

## Polygon pours and split planes (outlines as drawn)
GND on Bottom Layer 1 "GND_L04_P000" (solid, pour order 0): 0,3265 cw(c100,3265) 100,3365 2485,3365 cw(c2485,3265) 2585,3265 2585,100 cw(c2485,100) 2485,0 100,0 cw(c100,100) 0,100 0,435
"5V OUTPUT" on Layer 1 "5V_OUTPUT_L02_P006" (solid, pour order 6): 0,3265 cw(c100,3265) 100,3365 2485,3365 cw(c2485,3265) 2585,3265 2585,100 cw(c2485,100) 2485,0 100,0 cw(c100,100) 0,100 0,650
GND on Top Layer 1 "GND_L01_P001" (solid, pour order 1): 0,3260 cw(c100,3260) 100,3360 2485,3360 cw(c2485,3260) 2585,3260 2585,100 cw(c2485,100) 2485,0 100,0 cw(c100,100) 0,100 0,585

## Keep-outs
Top Layer 1:
  lines w10: 11.38,52.63 cw(c38.86,80.11) 0,80.11 0,3279.89 cw(c38.86,3279.89) 11.38,3307.37 ; 11.38,63.94 ccw(c51.81,63.94) 23.22,35.36 ccw(c108.58,120.71) 108.58,0 2485,0 ccw(c2485,100) 2555.71,29.29 ccw(c2485,100) 2585,100 2585,3251.42 ccw(c2464.29,3251.42) 2549.64,3336.78 2548.75,3337.68 ccw(c2494.85,3283.78) 2494.85,3360 105,3360 ccw(c105,3261.05) 35.03,3331.02 11.38,3307.37 ; 22.32,36.25 22.32,3280.95 ccw(c-15.04,3280.95) 11.38,3307.37 ; 35.48,39.2 ccw(c120.83,124.55) 120.83,3.84

## Text inside footprints (layer, text, board x,y; h text height)
J1: Mechanical 13 "PCB END" at 1943.98,3247.24 h16 r180